# Altium PCB c-mote.PcbDoc
Units mm, origin at the board's own origin, x right, y up, seen from the top; angles counter-clockwise.
Board outline 50 x 50 mm, 2 copper layers (Top Layer, Bottom Layer); 57 components, 46 nets, 216 pads, 36 vias.
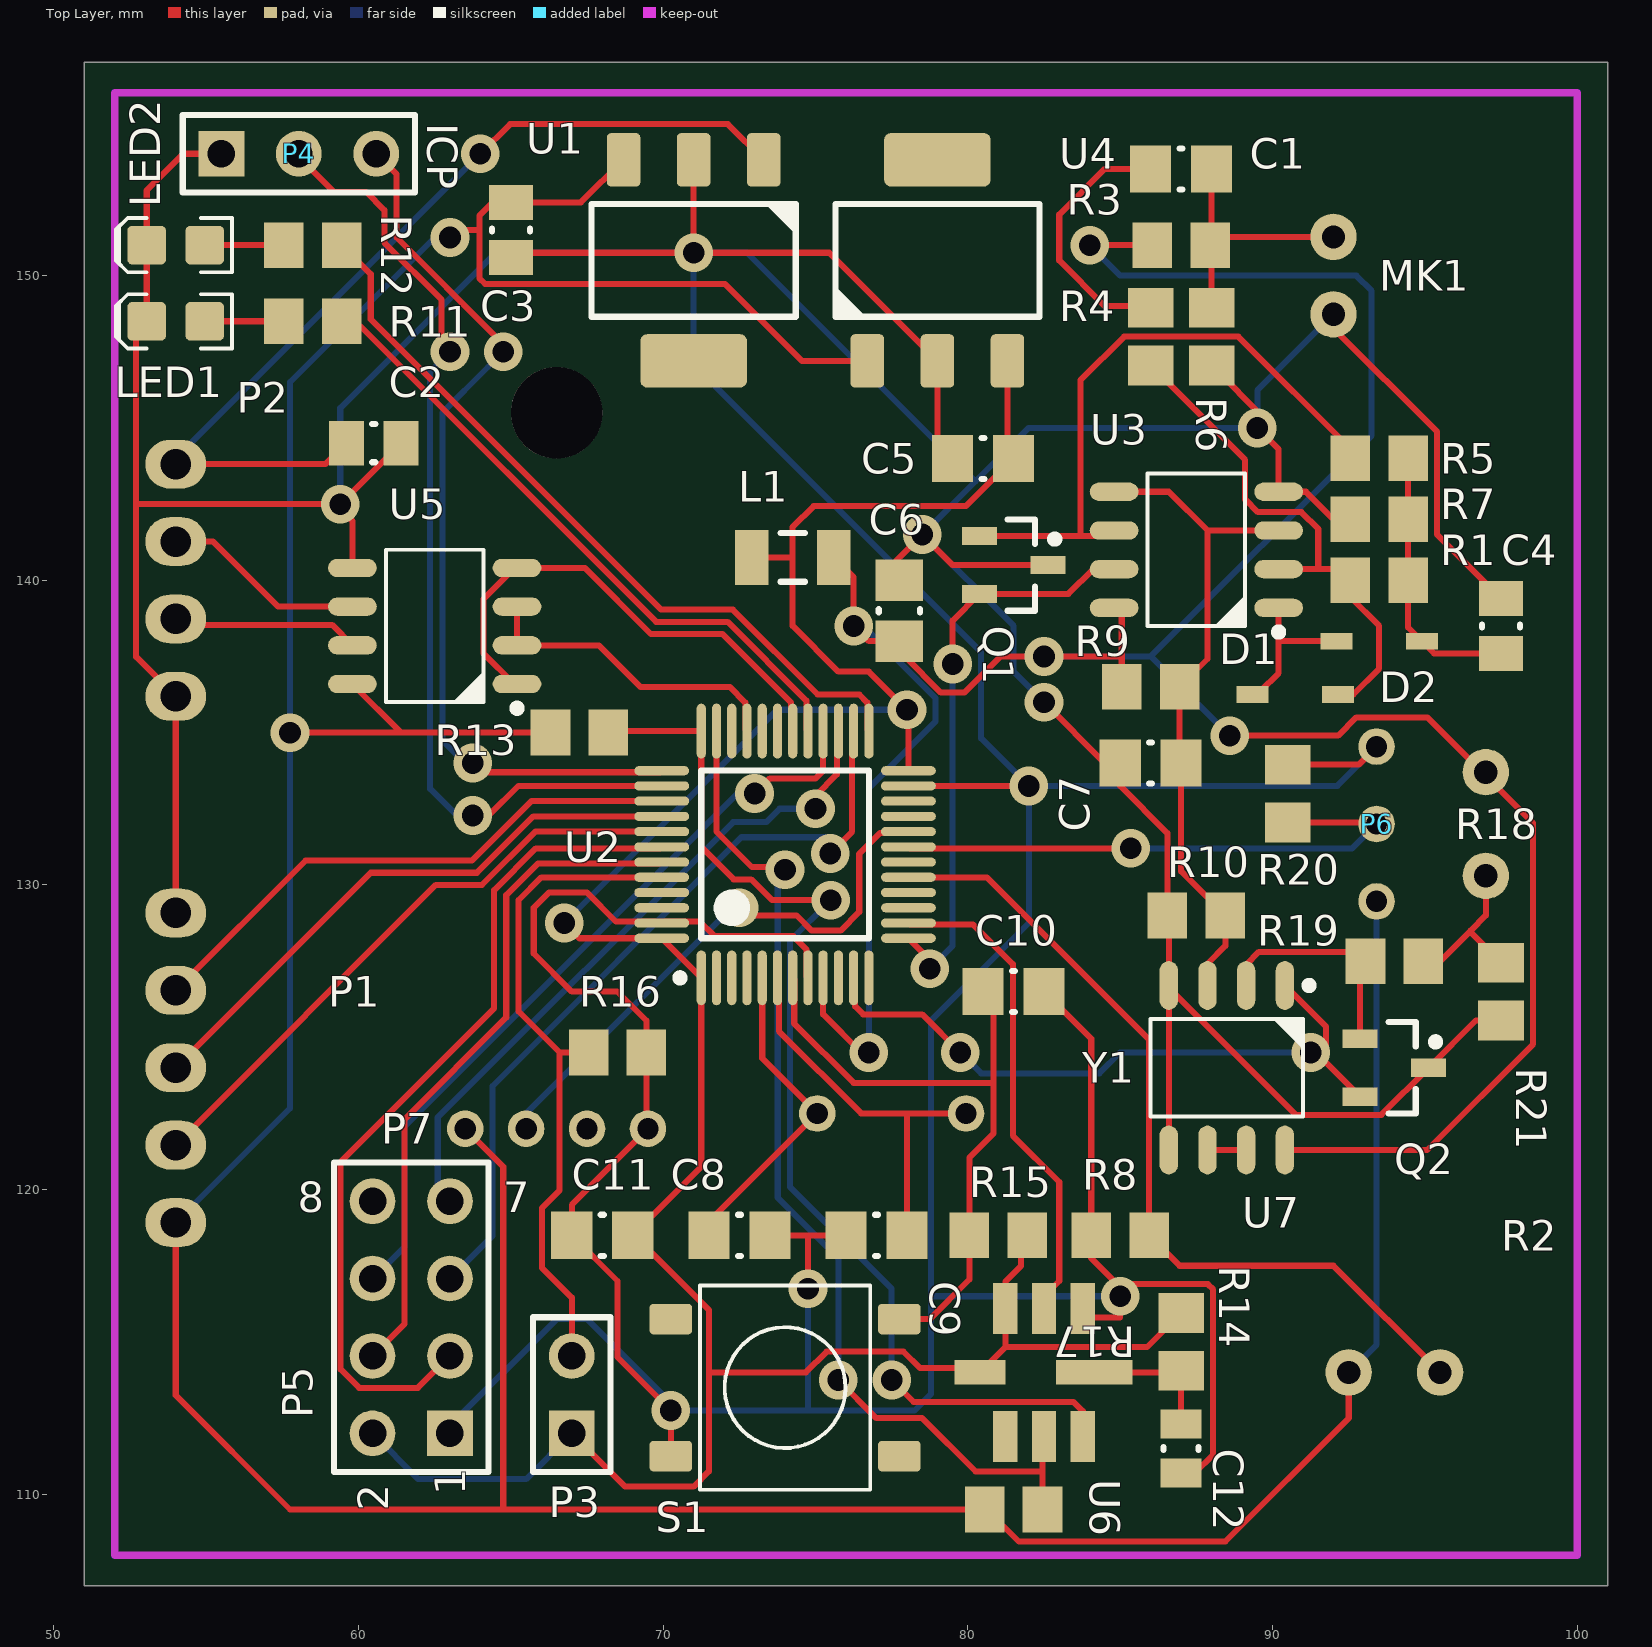
[diagram p0: Top Layer view]
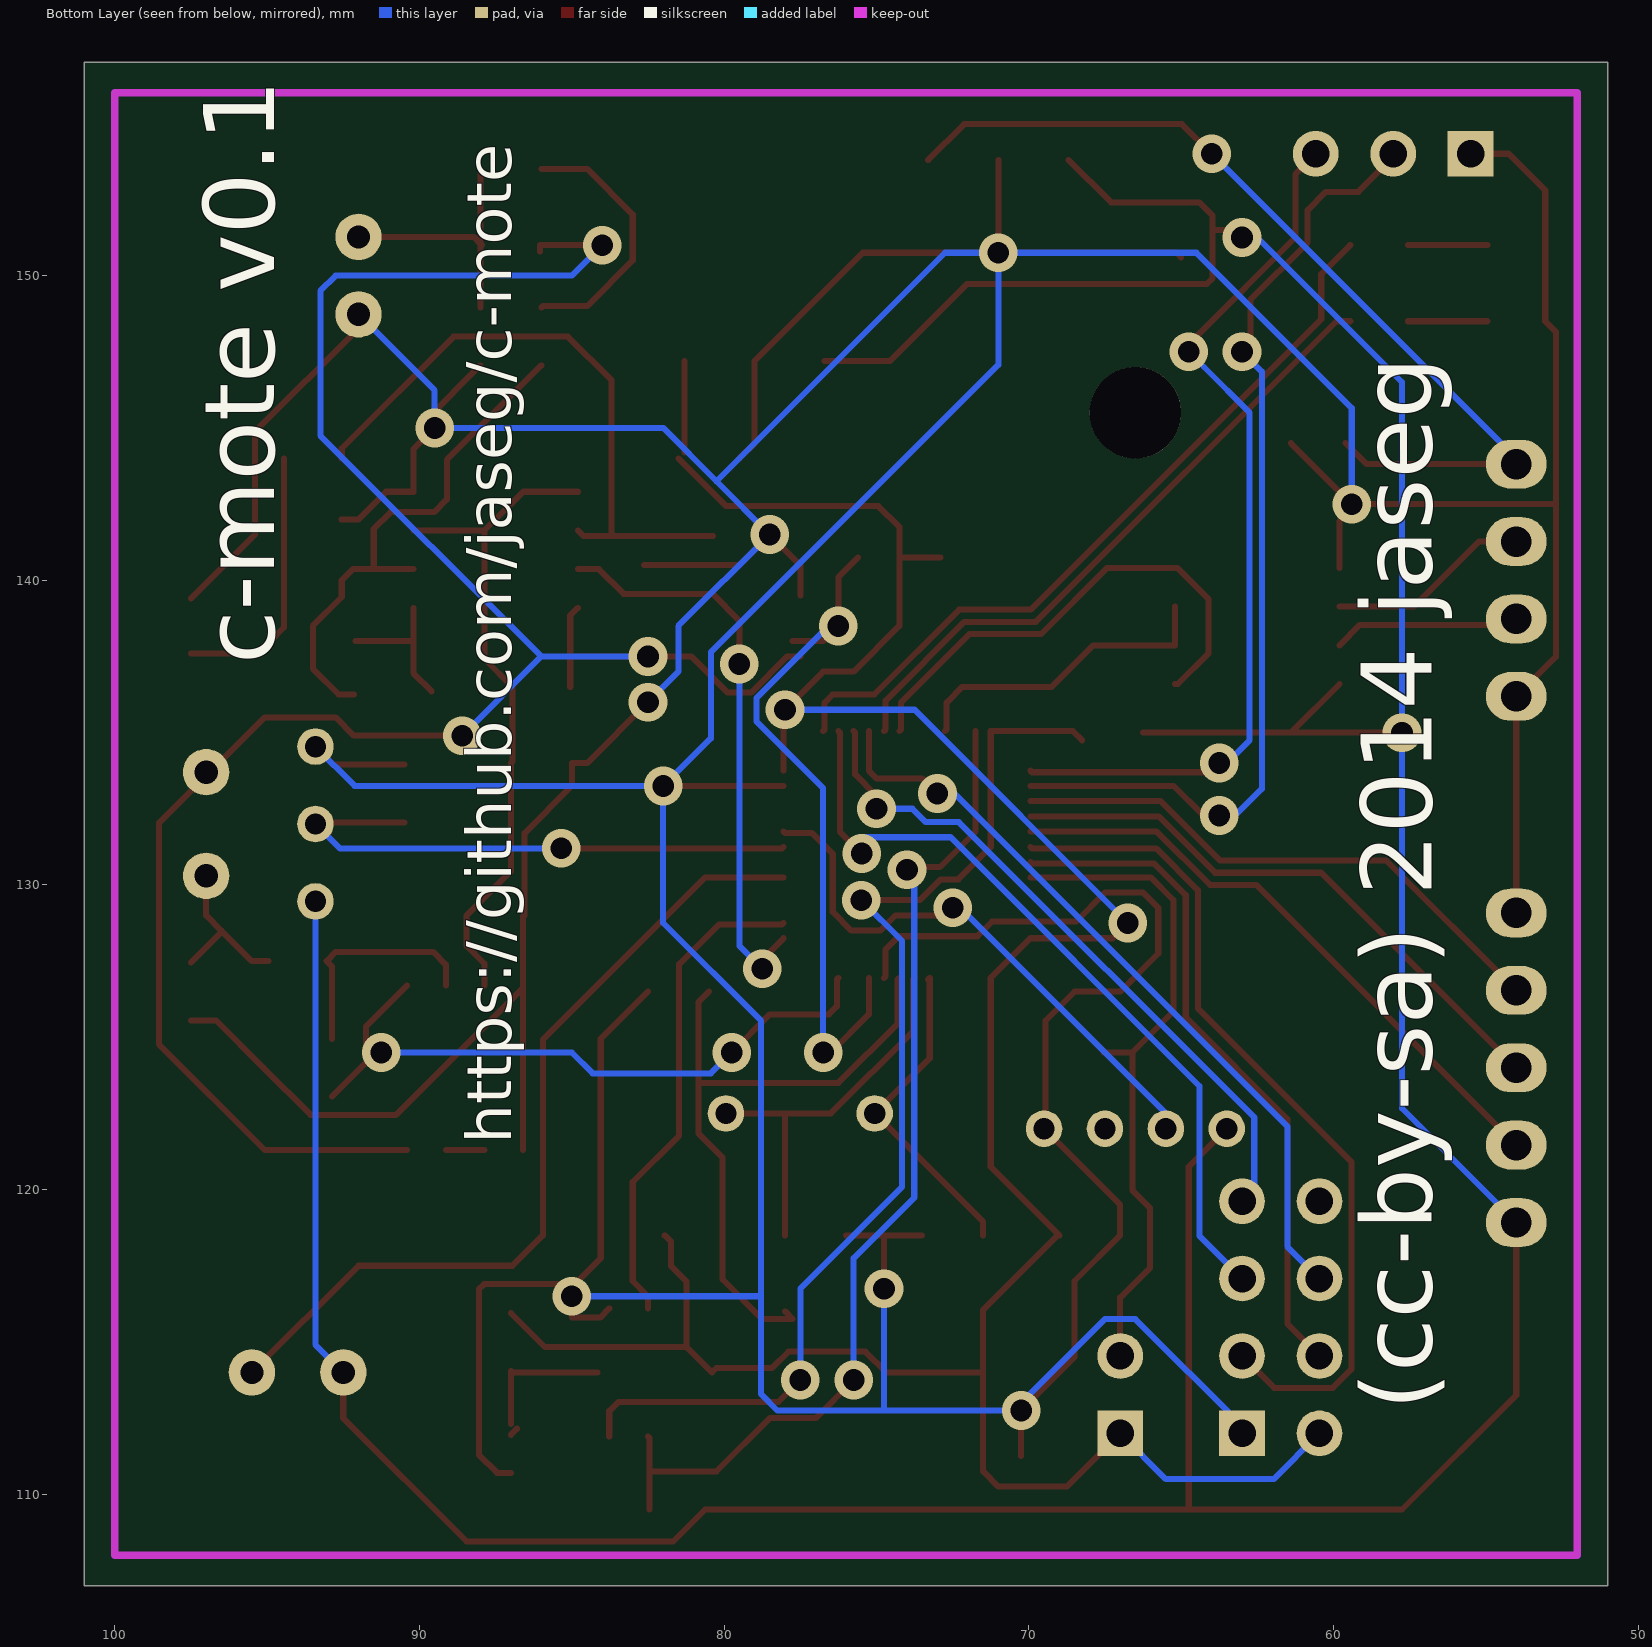
[diagram p1: Bottom Layer view, seen from below]

## Layer stack, top to bottom
Top Solder: solder mask 0.0102, Solder Resist, Dk 3.5
Top Layer: signal copper 0.0356
Dielectric 1: dielectric 0.32, FR-4, Dk 4.8
Bottom Layer: signal copper 0.0356
Bottom Solder: solder mask 0.0102, Solder Resist, Dk 3.5

## Board outline
51,107 101,107 101,157 51,157

## Design rules (kind name [scope] priority, off if disabled: settings)
Clearance [All] p1: gap=0.2
HoleSize [All] p1: absolutevalues=TRUE maxlimit=6.35 minlimit=0.3 maxpercent=80.000 minpercent=20.000
HoleToHoleClearance [All] p1: gap=0.6 allowstackedmicrovias=TRUE
PolygonConnect [All] p1: connectstyle=Relief reliefconductorwidth=0.254 reliefentries=4 polygonreliefangle="90 Angle" airgapwidth=0.254
RoomDefinition c-mote [InComponentClass('c-mote')] p1: confinementstyle=ConfineIn formatcopy=TRUE lockcomponents=FALSE outline 35,77.724 158.5,77.724 158.5,169.5 35,169.5
RoutingVias [All] p1: holewidth=0.6 width=1 viastyle="Through Hole" minholewidth=0.711 minwidth=1.27 maxholewidth=0.711 maxwidth=1.27
SolderMaskExpansion [All] p1: expansion=0.102
Width [All] p1: maxlimit=20 minlimit=0.152 preferedwidth=0.254
27 further rules are at their usual default settings.

## Components (designator, comment, footprint, x,y, rotation, side; value= is the part's Value field where it differs from the comment)
C1 "CAP 1uF 10V 0805(2012)" CAPC0805(2012)145_M 87,153.5 r0 top
C2 "CAP 4.7uF 10V 0805(2012)" CAPC0805(2012)145_N 60.5,144.5 r180 top
C3 "CAP 4.7uF 10V 0805(2012)" CAPC0805(2012)145_N 65,151.5 r90 top
C4 "CAP 2.2uF 10V 0805(2012)" CAPC0805(2012)145_N 97.5,138.5 r270 top
C5 "CAP 1uF 10V 0805(2012)" CAPC0805(2012)145_M 80.5,144 r0 top
C6 "CAP 1uF 10V 0805(2012)" CAPC0805(2012)145_M 77.75,139 r270 top
C7 "CAP 100nF 10V 0805(2012)" CAPC0805(2012)100_M 86,134 r0 top
C8 "CAP 22pF 10V 0805(2012)" CAPC0805(2012)100_M 72.5,118.5 r180 top
C9 "CAP 22pF 10V 0805(2012)" CAPC0805(2012)100_M 77,118.5 r0 top
C10 "CAP 470nF 10V 0805(2012)" CAPC0805(2012)145_M 81.5,126.5 r180 top
C11 "CAP 100nF 10V 0805(2012)" CAPC0805(2012)100_M 68,118.5 r0 top
C12 "CAP 10nF 10V 0805(2012)" CAPC0805(2012)100_L 87,111.5 r90 top
D1 "1N4148" SOD-323F 90.75,136.25 r180 top
D2 "1N4148" SOD-323F 93.5,138 r0 top
L1 "Inductor" INDC3216 74.25,140.75 r0 top
LED1 "Red" LED-0805-K 54,148.5 r180 top
LED2 "Green" LED-0805-K 54,151 r180 top
MK1 "OBO-04FP-0B" OBO-04FP-0B 94,150 r180 top
P1 "AKL629-V 5 pin" "AKL692-V 2.54MM 5PIN" 54,124 r90 top
P2 "AKL629-V 4 pin" "AKZ692-V 2.54MM 4PIN" 54,140 r90 top
P3 "BOOT" HDR1X2 67,112 r90 top
P4 "ICP" HDR1X3 55.5,154 r0 top
P5 "NRF24L01+" HDR2X4 63,112 r90 top
P6 "PIR" "CHINA-PIR SENSOR" 83,132 r90 top locked
P7 "DHT22" DHT22-H 66.5,122 r0 top locked
Q1 "BC817-25" SOT23_N 81.5,140.5 r0 top
Q2 "BC817-25" SOT23_N 94,124 r0 top
R1 "100k" 6-0805 93.5,140 r180 top
R2 "MQ214" MQ214 94,114 r0 top
R3 "10k" 6-0805 87,151 r180 top
R4 "2k2" 6-0805 86,148 r90 top
R5 "470" 6-0805 93.5,144 r180 top
R6 "10k" 6-0805 88,148 r90 top
R7 "470k" 6-0805 93.5,142 r180 top
R8 "50" 6-0805 85,118.5 r0 top
R9 "10k" 6-0805 86,136.5 r180 top
R10 "10k" 6-0805 87.5,129 r0 top
R11 "150" 6-0805 58.5,148.5 r0 top (schematic designator R13)
R12 "100" 6-0805 58.5,151 r0 top
R13 "4k7" 6-0805 67.25,135 r0 top
R14 "4k7" 6-0805 81.5,109.5 r0 top
R15 "100k" 6-0805 81,118.5 r0 top
R16 "100k" 6-0805 68.5,124.5 r180 top
R17 "100k" 6-0805 87,115 r90 top
R18 "LDR" KE-10720 97,132 r270 top
R19 "470" 6-0805 94,127.5 r180 top
R20 "200k" 6-0805 90.5,133 r270 top
R21 "1k" 6-0805 97.5,126.5 r270 top
S1 "TS-1143S-WP" TS-1143S 74,113.5 r0 top
U1 "AMS1117-5.0" SOT223 71,150.5 r270 top
U2 "STM32F030C6T6" STM-LQFP48_N 74,131 r90 top
U3 "LM358AD" SOIC127P600X175-8AN 87.5,141 r180 top
U4 "AMS1117-3.3" SOT223 79,150.5 r90 top
U5 "SN75176AD" SOIC127P600X175-8AN 62.5,138.5 r180 top
U6 "BMP085" BMP085 82.5,114 r270 top
U7 "LM358AD" SOIC127P600X175-8AN 88.5,124 r270 top
Y1 "16MHz" HC49/US 77.5,122.5 r180 top

## Footprints (in the part's own frame and the unit in brackets; to place one, negate y for a bottom-side part, rotate by r counter-clockwise, add the part's x,y. Pads: shape width x height; smd on the part's side, far side on the other; paste and mask are expansions set on the pad)
6-0805 [mm] "Chip Resistor; Body 2 x 1.2 mm (LxW typ)"
  rect 1.3x1.5 smd: 1(-0.95,0) 2(0.95,0)
"AKL692-V 2.54MM 5PIN" [mm]
  oval 1.6x2 hole 1: 1(-5.08,0) 2(-2.54,0) 3(0,0) 4(2.54,0) 5(5.08,0)
"AKZ692-V 2.54MM 4PIN" [mm]
  oval 1.6x2 hole 1: 1(-3.81,0) 2(-1.27,0) 3(1.27,0) 4(3.81,0)
BMP085 [mm]
  rect 1.67x0.8 smd: 1(-2.1,1.27) 2(-2.1,0) 3(-2.1,-1.27) 5(2.1,-1.27) 6(2.1,0) 7(2.1,1.27)
  rect 0.8x1.67 smd: 4(0,-2.1)
  rect 0.8x2.5 smd: 8(0,1.65)
CAPC0805(2012)100_L [mm] "Chip Capacitor, Body 2.0x1.2mm, Height 1.0mm, IPC High Density"
  rect 0.95x1.35 smd: 1(-0.8,0) 2(0.8,0)
  silkscreen extent -0.05,-0.57 0.05,0.57, body extent -1.1,-0.72 1.1,0.72, height 1
CAPC0805(2012)100_M [mm] "Chip Capacitor, Body 2.0x1.2mm, Height 1.0mm, IPC Low Density"
  rect 1.35x1.55 smd: 1(-1,0) 2(1,0)
  silkscreen extent -0.05,-0.67 0.05,0.68, body extent -1.1,-0.72 1.1,0.72, height 1
CAPC0805(2012)145_M [mm] "Chip Capacitor, Body 2.0x1.2mm, Height 1.45mm, IPC Low Density"
  rect 1.35x1.55 smd: 1(-1,0) 2(1,0)
  silkscreen extent -0.05,-0.68 0.05,0.68, body extent -1.1,-0.72 1.1,0.72, height 1.45
CAPC0805(2012)145_N [mm] "Chip Capacitor, Body 2.0x1.2mm, Height 1.45mm, IPC Medium Density"
  rect 1.15x1.45 smd: 1(-0.9,0) 2(0.9,0)
  silkscreen extent -0.05,-0.62 0.05,0.62, body extent -1.1,-0.72 1.1,0.73, height 1.45
"CHINA-PIR SENSOR" [mm]
  round 1.2 hole 0.7: 1(-2.54,-10.414) 2(0,-10.414) 3(2.54,-10.414)
DHT22-H [mm]
  round 1.2 hole 0.7: 1(-3,0) 2(-1,0) 3(1,0) 4(3,0)
HC49/US [mm] "Standing, THT low-profile crystal"
  round 1.2 hole 0.7: 1(-2.44,0) 2(2.44,0)
HDR1X2 [mm] "Connector; Header; 2 Position"
  rect 1.5x1.5 hole 0.9: 1(0,0)
  round 1.5 hole 0.9: 2(2.54,0)
  silkscreen extent -1.27,-1.27 3.81,1.27
HDR1X3 [mm] "Connector; Header; 3 Position"
  rect 1.5x1.5 hole 0.9: 1(0,0)
  round 1.5 hole 0.9: 2(2.54,0) 3(5.08,0)
  silkscreen extent -1.27,-1.27 6.35,1.27
HDR2X4 [mm] "Connector; Header; 4x2 Position"
  rect 1.5x1.5 hole 0.9: 1(0,0)
  round 1.5 hole 0.9: 2(0,2.54) 3(2.54,0) 4(2.54,2.54) 5(5.08,0) 6(5.08,2.54) 7(7.62,0) 8(7.62,2.54)
  silkscreen extent -1.27,-1.27 8.89,3.81
INDC3216 [mm] "Chip Inductor, Body 3.2x1.6mm, IPC High Density"
  rect 1.1x1.8 smd: 1(-1.35,0) 2(1.35,0)
  silkscreen extent -0.4,-0.8 0.4,0.8, body extent -1.7,-0.9 1.7,0.9, height 0.55
KE-10720 [mil]
  round 60 hole 30: 1(-66.93,0) 2(66.93,0)
LED-0805-K [mil]
  round 20 on Mech15: 0(0,0)
  rrect25% 50x50 smd: A(-37.5,0) K(37.5,0)
  Top Layer pour cut-out: -15,30 15,30 15,-30 -15,-30
  silkscreen extent -72,-35 77,35, body extent -39,-25 39,25, height 31
MQ214 [mil]
  round 60 hole 30: 1(-59.06,0) 2(59.06,0)
OBO-04FP-0B [mil]
  round 60 hole 30: 1(78.74,-50) 2(78.74,50)
SOD-323F [mm]
  rect 1.05x0.55 smd: 1(-1.4,0) 2(1.4,0)
SOIC127P600X175-8AN [mm] "SOIC, 8-Leads, Body 4.9x3.9mm, Pitch 1.27mm, IPC Medium Density"
  round 1 on Mech15: 0(0,0)
  oval 1.6x0.6 smd: 1(-2.7,1.905) 2(-2.7,0.635) 3(-2.7,-0.635) 4(-2.7,-1.905) 5(2.7,-1.905) 6(2.7,-0.635) 7(2.7,0.635) 8(2.7,1.905)
  silkscreen extent -2.83,-2.5 1.6,2.82, body extent -3,-2.45 3,2.45, height 1.75
SOT23_N [mm] "SOT23, 3-Leads, Body 2.9x1.3mm, Pitch 0.95mm, Lead Span 2.3mm - Reverse Pinning, IPC Medium Density"
  rect 1.15x0.6 smd: 1(1.125,0) 2(-1.125,-0.95) 3(-1.125,0.95)
  silkscreen extent -0.2,-1.5 1.48,1.5, body extent -0.7,-1.5 0.7,1.5, height 1.1
SOT223 [mm] "SOT223 /SC-73"
  round 1 on Mech15: 0(0,0)
  rrect25% 1.75x1.1 smd: 1(-3.3,2.3) 2(-3.3,0) 3(-3.3,-2.3)
  rrect25% 1.75x3.5 smd: 4(3.3,0)
  silkscreen extent -1.85,-3.35 1.85,3.35, body extent -3.65,-3.35 3.65,3.35, height 1.8
STM-LQFP48_N [mm] "QFP, 48-Leads, Body 7x7mm, Pitch 0.5mm, IPC Medium Density"
  oval 1.8x0.3 smd: 1(-4.05,2.75) 2(-4.05,2.25) 3(-4.05,1.75) 4(-4.05,1.25) 5(-4.05,0.75) 6(-4.05,0.25) 7(-4.05,-0.25) 8(-4.05,-0.75) 9(-4.05,-1.25) 10(-4.05,-1.75) 11(-4.05,-2.25) 12(-4.05,-2.75) 25(4.05,-2.75) 26(4.05,-2.25) 27(4.05,-1.75) 28(4.05,-1.25) 29(4.05,-0.75) 30(4.05,-0.25) 31(4.05,0.25) 32(4.05,0.75) 33(4.05,1.25) 34(4.05,1.75) 35(4.05,2.25) 36(4.05,2.75)
  oval 0.3x1.8 smd: 13(-2.75,-4.05) 14(-2.25,-4.05) 15(-1.75,-4.05) 16(-1.25,-4.05) 17(-0.75,-4.05) 18(-0.25,-4.05) 19(0.25,-4.05) 20(0.75,-4.05) 21(1.25,-4.05) 22(1.75,-4.05) 23(2.25,-4.05) 24(2.75,-4.05) 37(2.75,4.05) 38(2.25,4.05) 39(1.75,4.05) 40(1.25,4.05) 41(0.75,4.05) 42(0.25,4.05) 43(-0.25,4.05) 44(-0.75,4.05) 45(-1.25,4.05) 46(-1.75,4.05) 47(-2.25,4.05) 48(-2.75,4.05)
  silkscreen extent -4.17,-2.75 2.75,3.57, body extent -3.5,-3.5 3.5,3.5, height 1.6
TS-1143S [mm] "6.5x6.5mm SMD tact switch 4.3mm stem"
  round 0.508 on Mech15: 0(0,0)
  rrect25% 1.4x1 smd: 1(-3.75,2.25) 1(3.75,2.25) 2(-3.75,-2.25) 2(3.75,-2.25)
  silkscreen extent -2.79,-3.35 2.79,3.35, body extent -4,-3.25 4,3.25, height 4.3

## Part data
C1 C5 C6: library part CMP-1036-04740-1, "CAP 1uF 10V ±20% 0805 (2012 Metric) Thickness 1.45mm SMD"
C2 C3: library part CMP-1036-04884-1, "CAP 4.7uF 10V ±20% 0805 (2012 Metric) Thickness 1.45mm SMD"
C4: library part CMP-1036-04824-1, "CAP 2.2uF 10V ±10% 0805 (2012 Metric) Thickness 1.45mm SMD"
C7 C11: library part CMP-1036-04394-1, "CAP 100nF 10V ±10% 0805 (2012 Metric) Thickness 1mm SMD"
C8 C9: library part CMP-1036-01210-1, "CAP 22pF 10V ±5% 0805 (2012 Metric) Thickness 1mm SMD"
C10: library part CMP-1036-04631-1, "CAP 470nF 10V ±10% 0805 (2012 Metric) Thickness 1.45mm SMD"
C12: library part CMP-1036-03809-1, "CAP 10nF 10V ±10% 0805 (2012 Metric) Thickness 1mm SMD"
D1 D2: "High Conductance Fast Diode"
LED1: library part LED_SMD_Red_0805_6mcd, "LED 0805 SMD Red 6mcd 621nm"
LED2: library part LED_SMD_Green_0805_6mcd, "LED, 0805 SMD, Green"
MK1: library part Mic2, "Microphone"
P3: library part "Header 2", "Header, 2-Pin"
P4 P6: library part "Header 3", "Header, 3-Pin"
P5: library part "Header 4X2", "Header, 4-Pin, Dual row"
P7: library part "Header 4", "Header, 4-Pin"
Q1 Q2: "NPN General Purpose Amplifier"
R1 R3 R4 R5 R6 R7 R8 R9 R10 R11 R12 R13 R14 R15 R16 R17 R19 R20 R21: library part ERJ6RB, "Precision Thick Film Chip Resistor, 10 Ohm to 1M Ohm Range, 1% and 0.5% Tolerance, 0805 Size, 0.1 W"
R18: "KE-10720"
S1: library part SW_SMD_PB_4.3mm, "Switch SMD Tact 4.3mm Stem"
U1 U4: library part AMS1117
U2: library part CMP-0304-00027-2, "ARM Cortex-M0 32-bit MCU, 32 KB Flash, 4 KB Internal RAM, 39 I/Os, 48-pin LQFP, -40 to 85 degC, Tray"
U3 U7: "Dual Operational Amplifier"
U5: "Differential Bus Transceiver"
Y1: library part XTAL, "Crystal"

## Free pads (board coordinates)
  round 3 hole 3 unplated: 1(66.5,145.5)

## Via types
v1: diameter 1.27, hole 0.711, Top Layer to Bottom Layer, 36 vias

## Nets (pads, with @x,y where several pads share a name; then routed paths per layer and width w, separated by ;. In a path a pad name is that pad's centre, name@x,y a point inside that pad or via, vN(x,y) a via of type N, cw(c..) or ccw(c..) an arc to the next point about the centre after c; other vN are vias at no path point)
+3V3: C5.2 C11.2 L1.1 P3.1 P5.2 R15.2 R17.2 U2.1 U2.24 U2.48 U4.3 U6.3 U6.4 | length 94.3
  Top Layer w0.2: v1(66.75,128.75) 67.25,128.25 U2.48 U2.1 71.25,120.75 C11.2 69.051,118.5 71.5,116.051 71.5,114 ; P3.1 68.75,110.25 71,110.25 71.5,110.75 71.5,114 ; L1.1 74.25,140.75 ; U2.24 78.05,135.7 v1(78,135.75) 76.75,137 75.75,137 74.25,138.5 74.25,140.75 ; C5.2@81.3,144.2 U4.3 ; C5.2 79.935,142.435 74.935,142.435 74.25,141.75 74.25,140.75 ; R15.2 81.75,118.3 81.75,117.5 81.23,116.98 U6.3 81.23,114.83 ; R17.2 85.88,114.83 81.23,114.83 ; 71.5,114 74.678,114 75.363,114.685 77.887,114.685 78.422,114.15 80.25,114.15 U6.4 81.23,114.83
  Bottom Layer w0.2: P5.2 61.96,110.5 65.5,110.5 P3.1 ; v1(66.75,128.75) 73.75,135.75 v1(78,135.75)
AVCC: C6.2 L1.2 R3.2 R9.2 R18.1 U2.9 U3.8 U7.8 | length 97.7
  Top Layer w0.2: U2.9 75.25,125.75 76.5,124.5 v1(76.75,124.5) ; L1.2 76.25,140.1 v1(76.25,138.5) 76.75,138 C6.2 ; C6.2@77.5,137.5 77.928,137.5 79.113,136.315 79.887,136.315 81.072,137.5 v1(82.5,137.5) 85.05,137.5 ; v1(84,151) R3.2 R3.2@86.05,150.784 ; U3.8 85.05,138.845 85.05,137.5 ; R9.2 85.05,137.5 ; v1(88.6,134.9) 92.15,134.9 92.75,135.5 95.08,135.5 98.55,132.03 98.55,124.776 95.074,121.3 U7.8
  Bottom Layer w0.2: v1(76.25,138.5) 76.572,138.5 78.935,136.137 78.935,135.363 76.75,133.178 v1(76.75,124.5) ; v1(82.5,137.5) 86,137.5 ; v1(84,151) 85,150 92.75,150 93.25,149.5 93.25,144.75 86,137.5 ; v1(88.6,134.9) 86,137.5
BAR_EOC: U2.14 U6.2 | length 16.1
  Top Layer w0.2: U2.14 78.1,128.7 80.174,128.7 81.475,127.399 81.475,121.775 83,120.25 83,117 82.5,116.5 U6.2
GND: C2.1 C3.1 C4.1 C5.1 C6.1 C7.1 C8.1 C9.1 C10.1 C11.1 C12.1 LED1.K LED2.K MK1.2 P1.5 P2.1 P4.1 P5.1 P6.3 P7.4 Q1.1 Q2.1 R6.1 R7.2 R8.1 R10.1 R16.1 R20.1 R21.2 S1.2 U1.2 U2.8 U2.23 U2.47 U3.4 U4.2 U5.5 U6.1 U7.4 U7.5 | length 324.2
  Top Layer w0.2: 52.7,142.5 v1(59.4,142.5) C2.1 ; P1.5 P2.1 52.7,137.49 52.7,148.152 LED1.K LED2.K 53.047,152.797 54.25,154 P4.1 ; v1@59.25,142.5 59.8,141.95 U5.5 ; C3.1 65.15,150.75 v1(71,150.75) ; S1.2@70.25,111.25 v1(70.25,112.75) 68.5,114.5 68.5,117 C11.1 67,119.5 P7.4 69.45,122.05 R16.1 69.45,125.55 68.5,126.5 67,126.5 65.75,127.75 65.75,129.25 66.25,129.75 67.5,129.75 68.45,128.8 71.2,128.8 71.685,128.315 74.271,128.315 74.7,127.886 74.7,127 U2.8 ; v1(71,150.75) 75.45,150.75 U4.2 79,144.5 C5.1 ; v1@71,150.85 71,152 U1.2 ; C8.1 74.75,118.5 ; v1(74.75,116.75) 74.75,118.5 ; C9.1 74.75,118.5 ; C6.1@77.5,139.5 77.5,140.5 v1(78.5,141.5) 79.5,140.5 Q1.1 ; U2.23 v1(82,133.25) ; C10.1 84.05,124.95 R8.1 84.05,117.75 85,116.8 v1(85,116.5) ; v1(82.5,136) 84.5,134 C7.1 85,133.25 86.55,131.7 R10.1 86.595,128.955 U7.4 U7.4@86.595,126.621 ; U6.1 84.07,115.8 85,115.8 v1(85,116.5) ; U7.5 U7.4@86.595,126.621 ; C12.1 87.45,110.7 88.05,111.3 88.05,116.724 87.874,116.9 85.4,116.9 v1(85,116.5) ; R6.1 v1@89.775,145.275 ; v1@89.5,145 90.2,144.3 U3.4 91.095,142.905 92,142 R7.2 ; R20.1 92.824,133.95 P6.3 ; MK1.2 92,148.274 95.4,144.874 95.4,141.5 C4.1 ; Q2.1@95.124,124 93.574,122.45 90.767,122.45 U7.4@86.595,126.621 ; Q2.1 96.675,125.55 R21.2
  Bottom Layer w0.2: v1(59.4,142.5) 59.4,145.65 64.5,150.75 v1(71,150.75) ; P5.1 63,112.25 66.5,115.75 67.5,115.75 70.25,113 v1(70.25,112.75) 74.75,112.75 ; v1(74.75,116.75) 74.75,112.75 ; 78.786,116.5 v1(85,116.5) ; v1(82.5,136) 81.5,137 81.5,138.5 v1(78.5,141.5) 80.25,143.25 ; MK1.2 89.5,146.23 v1(89.5,145) 82,145 80.25,143.25 ; P6.3 92.124,133.25 v1(82,133.25) ; v1(71,150.75) 72.75,150.75 80.25,143.25 ; v1(71,150.75) 71,147.072 80.435,137.637 80.435,134.815 v1(82,133.25) ; 74.75,112.75 78.25,112.75 78.786,113.286 78.786,125.536 82,128.75 v1(82,133.25)
HUMIDITY_TEMP: P7.2 U2.20 | length 19.1
  Top Layer w0.2: v1(72.5,129.25) 72.75,129 74.375,129 74.875,128.5 75.822,128.5 76.435,129.113 76.435,131.021 77.114,131.7 78,131.7 U2.20
  Bottom Layer w0.2: P7.2 65.5,122.5 72,129 72.75,129 v1(72.5,129.25)
IO1: P1.4 U2.39 | length 18.5
  Top Layer w0.2: P1.4 58.26,130.8 63.722,130.8 65.672,132.75 U2.39
IO2: P1.3 U2.40 | length 19.4
  Top Layer w0.2: P1.3 60.4,130.4 63.887,130.4 65.737,132.25 U2.40
IO3: P1.2 U2.41 | length 20.2
  Top Layer w0.2: P1.2 62.54,130 64.053,130 65.803,131.75 U2.41
LED1: R11.2 U2.29 | length 21.4
  Top Layer w0.2: R11.2 59.9,148.5 69.765,138.635 72.117,138.635 74.7,136.052 74.7,135.1 U2.29
LED2: R12.2 U2.25 | length 25.3
  Top Layer w0.2: R12.2 60.4,150.05 60.4,148.566 69.931,139.035 72.283,139.035 75.068,136.25 76.436,136.25 76.7,135.986 76.7,135.1 U2.25
LIGHT: Q2.2 U2.11 U7.1 | length 21.5
  Top Layer w0.2: U2.11 76.3,126.9 76.3,126.014 76.564,125.75 78.5,125.75 v1(79.75,124.5) ; U7.1 91.75,125.355 v1@91.75,124.5 ; v1@91.75,124.175 Q2.2
  Bottom Layer w0.2: v1(79.75,124.5) 80.435,123.815 84.315,123.815 85,124.5 v1(91.25,124.5)
METHANE: R2.2 R8.2 U2.17 | length 27.9
  Top Layer w0.2: U2.17 80.624,130.25 85.95,124.924 R8.2 86.95,117.5 92,117.5 R2.2
MISO: P5.7 U2.27 | length 22.4
  Top Layer w0.2: v1(75,132.5) 75,132.934 75.7,133.634 75.7,135 U2.27
  Bottom Layer w0.2: P5.7 62.6,120.02 62.6,122.373 72.292,132.065 73.387,132.065 73.822,132.5 v1(75,132.5)
MOSI: P5.6 U2.28 | length 25.3
  Top Layer w0.2: v1(73,133) 73.5,133.5 75,133.5 75.25,133.75 U2.28
  Bottom Layer w0.2: P5.6 61.51,118.13 61.51,122.076 72.434,133 v1(73,133)
MOTION: P6.2 R20.2 U2.19 | length 18.7
  Top Layer w0.2: U2.19 78.1,131.2 v1(85.35,131.2) ; R20.2 93.364,132.05 P6.2@93.414,132
  Bottom Layer w0.2: v1(85.35,131.2) 92.614,131.2 P6.2
NetC1_1: C1.1 R4.2 | length 8.8
  Top Layer w0.2: R4.2 85.95,149 84.5,149 83,150.5 83,152 84.5,153.5 C1.1
NetC1_2: C1.2 MK1.1 R3.1 R6.2 | length 10.2
  Top Layer w0.2: R3.1@88,150.5 R6.2 88,150.95 R3.1 R3.1@88,151.05 ; C1.2 R3.1@88,151.05 ; MK1.1 88.22,151.27 R3.1@88,151.05
NetC4_2: C4.2 D2.2 R1.1 R5.1 R7.1 | length 9
  Top Layer w0.2: R5.1 R7.1 R1.1 94.45,138.45 D2.2 95.3,137.6 C4.2
NetC8_2: C8.2 U2.5 Y1.2 | length 10.7
  Top Layer w0.2: C8.2 71.5,118.94 Y1.2 73.25,124.31 U2.5 U2.5@73.3,126.9
NetC9_2: C9.2 U2.6 Y1.1 | length 13
  Top Layer w0.2: U2.6 73.8,126.9 73.8,125.2 76.5,122.5 78,122.5 ; C9.2 78,122.5 ; Y1.1 78,122.5
NetC10_2: C10.2 R15.1 S1.1 U2.7 | length 21.9
  Top Layer w0.2: U2.7 74.3,126.9 74.3,125.45 76.25,123.5 80.74,123.5 ; S1.1@78,116 77.75,115.75 78.75,115.75 80.05,117.05 R15.1 80.05,121.05 80.84,121.84 80.84,126.16 C10.2
NetC12_2: C12.2 R17.1 U6.8 | length 4.9
  Top Layer w0.2: U6.8 86.95,114 R17.1 C12.2 ; C12.2@86.8,112.15 C12.2@87,111.95
NetD1_1: D1.1 R1.2 R4.1 U3.2 | length 17.3
  Top Layer w0.2: R4.1 89.1,143.95 89.1,142.656 89.521,142.235 90.949,142.235 91.5,141.684 91.5,140.365 ; U3.2 91.5,140.365 ; D1.1 92.65,136.25 93.5,137.1 93.5,138.5 92.55,139.45 R1.2 92.185,140.365 91.5,140.365
NetD1_2: D1.2 D2.1 U3.1 | length 4.9
  Top Layer w0.2: D1.2@89.6,136.35 90.2,136.95 90.2,138 ; U3.1 90.2,138 ; D2.1 90.2,138
NetLED1_A: LED1.A R11.1 | length 2.6
  Top Layer w0.2: LED1.A R11.1
NetLED2_A: LED2.A R12.1 | length 2.6
  Top Layer w0.2: LED2.A R12.1
NetP2_2: P2.2 U5.7 | length 6.2
  Top Layer w0.2: P2.2 54.195,138.535 59.13,138.535 U5.7
NetP2_3: P2.3 U5.6 | length 6.7
  Top Layer w0.2: P2.3 55.23,141.27 57.365,139.135 U5.6
NetP3_2: P3.2 R16.2 U2.44 | length 22.1
  Top Layer w0.2: P3.2 67,116.45 66.025,117.425 66.025,119.399 66.6,119.974 66.6,124.5 ; R16.2 66.6,124.5 ; U2.44 66,130.25 65.25,129.5 65.25,125.85 66.6,124.5
NetP4_2: P4.2 U2.38 | length 31.9
  Top Layer w0.2: P4.2 58.04,153.894 59.184,152.75 60.25,152.75 60.85,152.15 60.85,151.084 62.728,149.206 v1@62.728,147.656 ; v1(63.75,132.28) 64.28,132.28 65.25,133.25 U2.38
  Bottom Layer w0.2: v1(63,147.5) 62.35,146.85 62.35,133.15 63.22,132.28 v1(63.75,132.28)
NetP4_3: P4.3 U2.37 | length 30.4
  Top Layer w0.2: P4.3 61.25,153.33 61.25,151.25 v1@64.5,148 ; v1(63.75,134) 63.75,133.7 69.014,133.7 69.9,133.7 U2.37 ; v1@64.25,147.5 v1(64.75,147.5)
  Bottom Layer w0.2: v1(63.75,134) 63.75,133.75 62.75,134.75 62.75,145.5 64.25,147 v1(64.75,147.5) v1@64.25,147.5
NetQ1_3: Q1.3 R5.2 U3.6 | length 20.9
  Top Layer w0.2: Q1.3 83.7,141.45 84.615,141.45 U3.6 ; 83.7,141.45 83.7,146.574 85.126,148 88.874,148 92.55,144.324 R5.2
NetQ2_3: Q2.3 R19.2 U7.2 | length 7.5
  Top Layer w0.2: U7.2 89.135,127.385 89.55,127.8 92.75,127.8 R19.2 92.875,127.325 Q2.3
NetR18_2: R18.2 R19.1 R21.1 | length 5.4
  Top Layer w0.2: R19.1 95.5,127.5 96.5,128.5 ; R18.2 97,129 96.5,128.5 ; R21.1 96.5,128.45 96.5,128.5
NetU7_6: U7.6 U7.7 | length 1.3
  Top Layer w0.2: U7.6 U7.7
NRF_CE: P5.3 U2.42 | length 28.2
  Top Layer w0.2: P5.3 61.95,113.49 60.025,113.49 59.41,114.105 59.41,120.91 64.45,125.95 64.45,129.831 65.819,131.2 69.9,131.2 U2.42
NRF_CSN: P5.4 U2.43 | length 22.5
  Top Layer w0.2: P5.4 61.51,115.59 61.51,122.31 64.85,125.65 64.85,129.666 65.884,130.7 69.9,130.7 U2.43
RS485_IO: U2.30 U5.1 U5.4 | length 16.6
  Top Layer w0.2: U5.1 65.105,136.595 64.1,137.6 64.1,139.384 65.121,140.405 U5.4 67.429,140.405 69.599,138.235 71.951,138.235 74.2,135.986 74.2,135.1 U2.30
RS485_TXEN: U2.33 U5.2 U5.3 | length 10.5
  Top Layer w0.2: U5.3 U5.2 67.885,137.865 69.25,136.5 72.186,136.5 72.7,135.986 72.7,135.1 U2.33
SCK: P5.5 U2.26 | length 26.4
  Top Layer w0.2: v1(75.479,131.03) 76.2,131.751 76.2,135 U2.26
  Bottom Layer w0.2: P5.5 64.4,118.48 64.4,123.4 72.565,131.565 75.565,131.565 75.479,131.479 v1(75.479,131.03)
SCL: R14.2 U2.35 U6.6 | length 34.6
  Top Layer w0.2: U2.35 71.75,131.75 72.915,130.585 73.915,130.585 v1(74,130.5) ; v1(75.75,113.75) 77,112.5 78.5,112.5 80.25,110.75 82.45,110.75 R14.2 ; 82.45,110.765 82.45,111.85 U6.6
  Bottom Layer w0.2: v1@73.5,130.5 v1(74,130.5) 73.76,130.26 73.76,119.74 75.75,117.75 v1(75.75,113.75)
SDA: R13.2 U2.36 U6.7 | length 37.1
  Top Layer w0.2: R13.2@68.25,134.75 68.55,135.05 U2.36 71.25,131.25 72.315,130.185 72.887,130.185 73.573,129.5 74,129.5 ; 74,129.5 v1(75.5,129.5) ; v1(77.5,113.75) 78.215,113.035 83.465,113.035 83.77,112.73 U6.7
  Bottom Layer w0.2: v1(75.5,129.5) 74.16,128.16 74.16,120.09 77.5,116.75 v1(77.5,113.75)
SOUND: Q1.2 U2.13 U3.7 | length 19
  Top Layer w0.2: U2.13 78.75,127.55 v1(78.75,127.25) ; v1(79.5,137.25) 79.5,138.675 Q1.2 83.3,139.55 84.115,140.365 U3.7
  Bottom Layer w0.2: v1(78.75,127.25) 79.5,128 v1(79.5,137.25)
VCC: C3.2 P1.1 P6.1 P7.1 R2.1 R13.1 R14.1 U1.3 U4.1 U5.8 | length 147.8
  Top Layer w0.2: P1.1 54,113.25 57.75,109.5 64.75,109.5 ; v1(57.75,135) 61.395,135 ; U5.8 61.395,135 ; v1(63,151.25) 63.25,151.5 63.975,151.5 ; P7.1 64.75,120.75 64.75,109.5 ; R13.1@66.25,135 61.395,135 ; U1.3 67.3,152.4 C3.2 64.4,152.4 63.975,151.975 63.975,151.5 ; U4.1 74.55,147.2 72.025,149.725 64.151,149.725 63.975,149.901 63.975,151.5 ; R2.1 92.5,112.5 88.45,108.45 81.676,108.45 80.626,109.5 R14.1 64.75,109.5
  Bottom Layer w0.2: P1.1 57.75,122.67 v1(57.75,135) 57.75,146.5 62.5,151.25 v1(63,151.25) ; R2.1 93.414,114.914 P6.1
VGND: C7.2 R9.1 R10.2 U3.3 U3.5 U7.3 | length 22.1
  Top Layer w0.2: U3.5 86.595,142.905 87.865,141.635 ; U7.3 87.865,127.415 88.45,128 R10.2 87,130.45 C7.2 86.95,134.05 R9.1 87.865,137.415 87.865,141.635 ; U3.3 87.865,141.635
VIN: C2.2 P2.4 U1.1 | length 30.4
  Top Layer w0.2: P2.4 58.91,143.81 C2.2 ; v1(64,154) 64.975,154.975 72.125,154.975 U1.1
  Bottom Layer w0.2: P2.4 54,144 v1(64,154)
pads on no net: LED1.0 LED2.0 P5.8 P7.3 S1.0 U1.0 U1.4 U2.2 U2.3 U2.4 U2.10 U2.12 U2.15 U2.16 U2.18 U2.21 U2.22 U2.31 U2.32 U2.34 U2.45 U2.46 U3.0 U4.0 U4.4 U5.0 U6.5 U7.0

## Keep-outs
Keep-Out Layer:
  lines w0.254: 52,108 52,156 100,156 100,108 52,108

## Silkscreen, mask and mechanical layers (free items; w line width, h text height)
Bottom Overlay:
  text "c-mote v0.1" at 94,137.25 h4 r270
  text "https://github.com/jaseg/c-mote" at 86.5,121.5 h2.54 r270
  text "(cc-by-sa) 2014 jaseg" at 56,112.75 h4 r270
Mechanical 1:
  lines w0.254: 75.746,132 76.254,132 ; 76,131.746 76,132.254
  text "76,132 (mm)" at 76.254,132 h1
Mechanical 2:
  lines w0.2: 75.479,131.03 75.479,131.479
Mechanical 3:
  lines w0.254: 74.75,116.75 75,116.5
Mechanical 16:
  lines w0.2: 73,130.322 73,131
Drill Drawing:
  text ".LEGEND" at 136,87.5 h1
  text "Drill Drawing." at 135.5,84.5 h1

## Dimensions
52,108 to 100,108 on Mechanical 1
52,108 to 52,156 on Mechanical 1

## Text inside footprints (layer, text, board x,y; h text height)
P5: Top Overlay "2" at 60.968,109.46 h1 r90; Top Overlay "1" at 63.508,109.968 h1 r90; Top Overlay "7" at 64.75,119.25 h1; Top Overlay "8" at 58,119.25 h1